# Altium PCB USB_NRF.PcbDoc
Units mil, origin at the board's own origin, x right, y up, seen from the top; angles counter-clockwise.
Board outline 2130 x 670 mil, 2 copper layers (Top Layer, Bottom Layer); 28 components, 32 nets, 154 pads, 96 vias.
Unrouted connection lines stored in the file: 3.
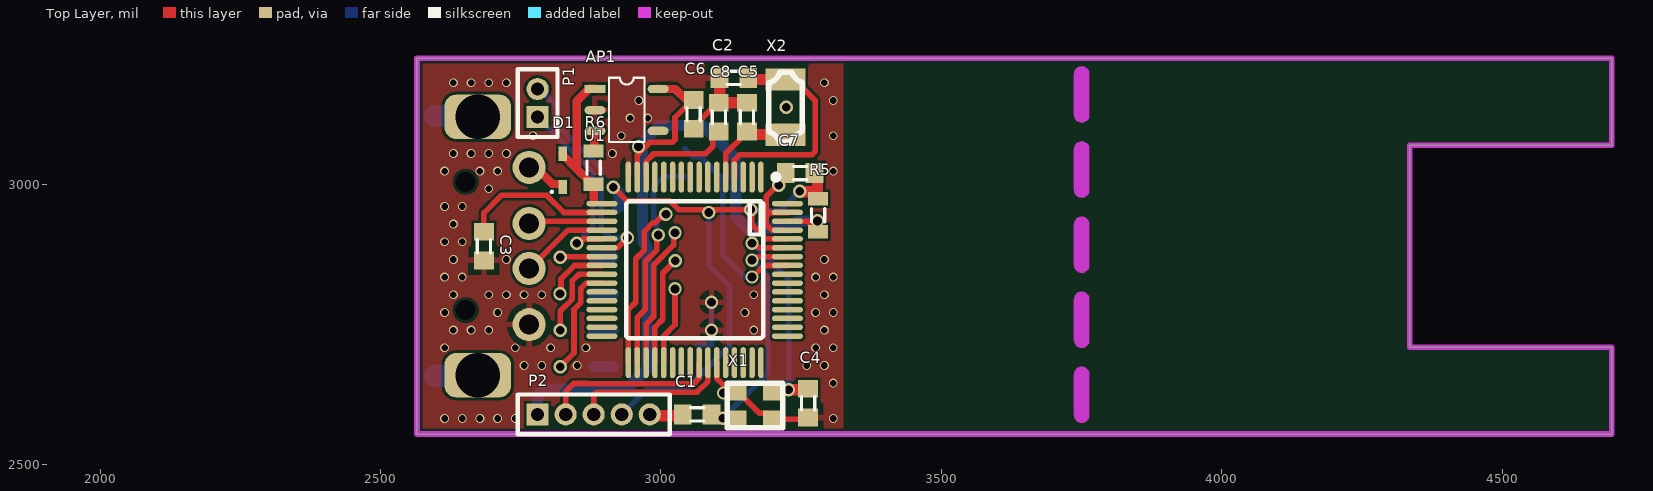
[diagram p0: Top Layer view]
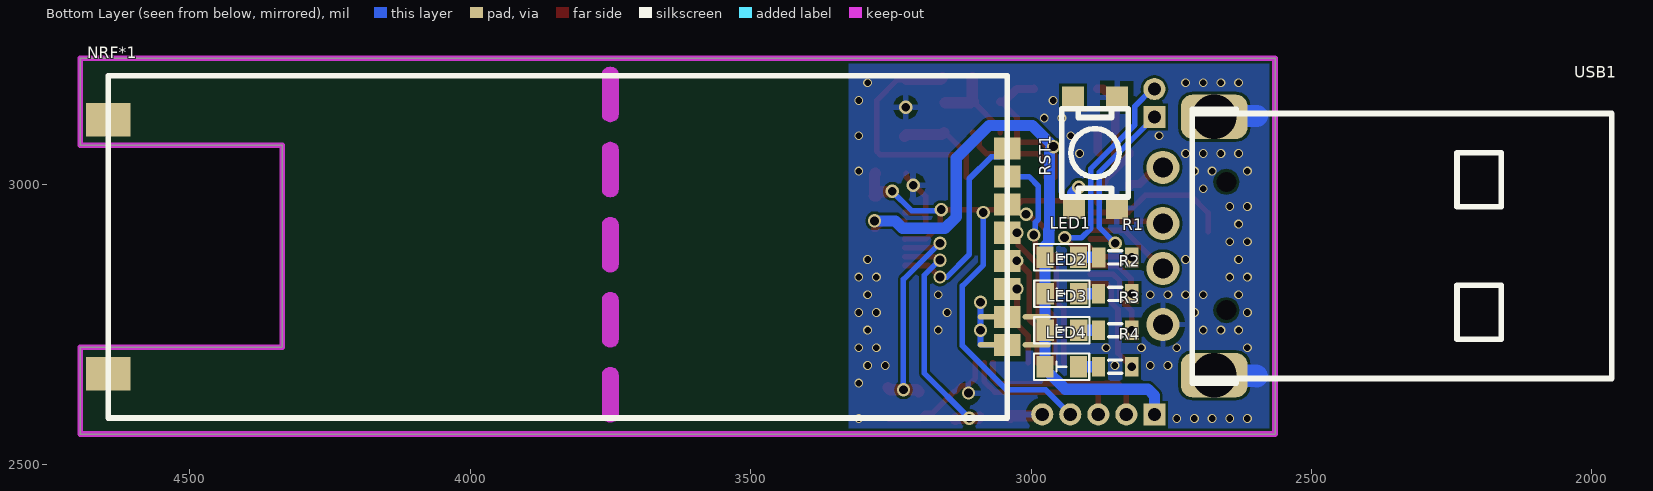
[diagram p1: Bottom Layer view, seen from below]
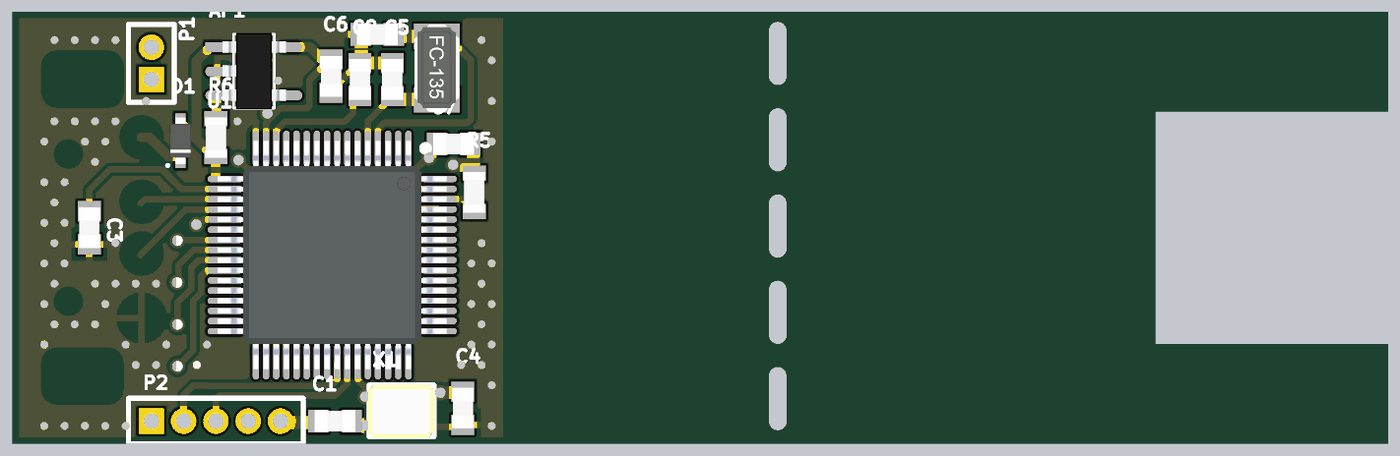
[diagram p2: 3D render of the assembled board from above, using the file's embedded part models]
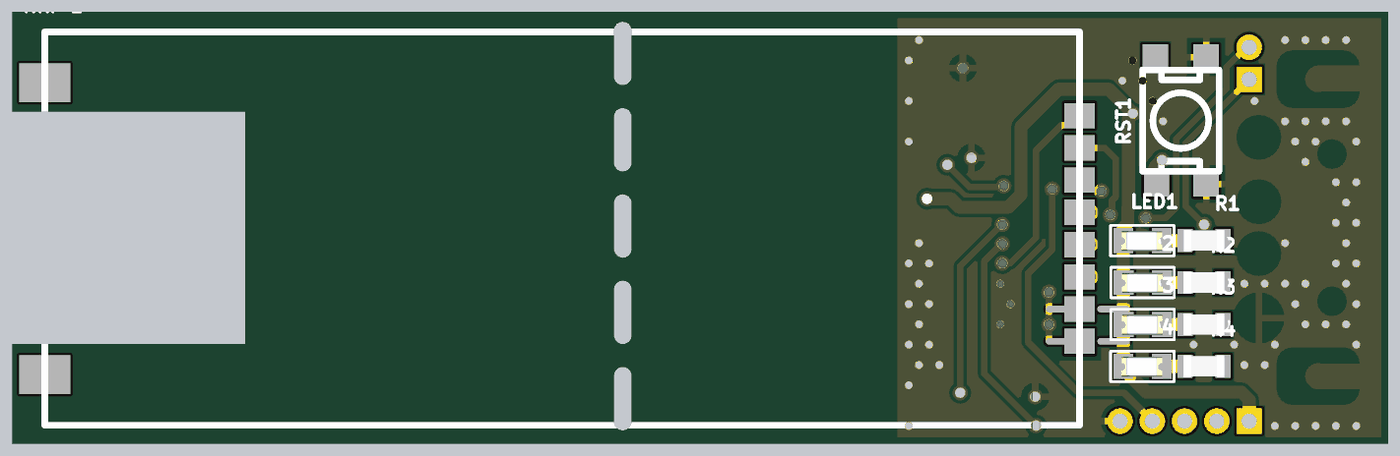
[diagram p3: 3D render of the assembled board from below, using the file's embedded part models]

## Layer stack, top to bottom
Top Solder: solder mask 0.4, Solder Resist, Dk 3.5
Top Layer: signal copper 1.4
Dielectric 1: dielectric 12.6, FR-4, Dk 4.8
Bottom Layer: signal copper 1.4
Bottom Solder: solder mask 0.4, Solder Resist, Dk 3.5

## Board outline
2565,2555 2565,3225 4695,3225 4695,3070 4335,3070 4335,2710 4695,2710 4695,2555
cut-out: 3736.21,2991.06 ccw(c3750,2991.06) 3763.79,2991.06 3763.79,3061.93 ccw(c3750,3061.93) 3736.21,3061.93
cut-out: 3736.21,2857.2 ccw(c3750,2857.2) 3763.79,2857.2 3763.79,2928.07 ccw(c3750,2928.07) 3736.21,2928.07
cut-out: 3736.21,2723.35 ccw(c3750,2723.35) 3763.79,2723.35 3763.79,2794.21 ccw(c3750,2794.21) 3736.21,2794.21
cut-out: 3736.21,2589.49 ccw(c3750,2589.49) 3763.79,2589.49 3763.79,2660.35 ccw(c3750,2660.35) 3736.21,2660.35
cut-out: 3736.21,3124.92 ccw(c3750,3124.92) 3763.79,3124.92 3763.79,3195.79 ccw(c3750,3195.79) 3736.21,3195.79

## Design rules (kind name [scope] priority, off if disabled: settings)
Clearance [All] p1: gap=5 ignorepadtopadclearanceinfootprint=FALSE
PolygonConnect [All] p1: connectstyle=Relief reliefconductorwidth=10 reliefentries=4 polygonreliefangle="90 Angle" airgapwidth=10
RoutingVias [All] p1: holewidth=28 width=50 viastyle="Through Hole" minholewidth=15.75 minwidth=23.62 maxholewidth=28 maxwidth=50
SolderMaskExpansion [All] p1: expansion=4
Width [All] p1: maxlimit=40 minlimit=7 preferedwidth=10 minimp=50.000000 maximp=50.000000 favimp=50.000000
30 further rules are at their usual default settings.

## Components (designator, comment, footprint, x,y, rotation, side; value= is the part's Value field where it differs from the comment)
AP1 "AP2112" SOT-23-5 2907.2,3190.24 r0 top
C1 "Cap" Cap_0603 3064.52,2590 r0 top value=20pf
C2 "Cap" Cap_0603 3130,3190 r0 top value=20pf
C3 "Cap" Cap_0603 2684.17,2890 r270 top value=1uf
C4 "Cap" Cap_0603 3262.36,2610 r90 top value=20pf
C5 "Cap" Cap_0603 3153.03,3120 r270 top value=20pf
C6 "Cap" Cap_0603 3058.31,3125 r90 top value=1uf
C7 "Cap" Cap_0603 3248.03,3020 r0 top value=0.1uf
C8 "Cap" Cap_0603 3103.03,3120 r270 top value=1uf
D1 "Schottky" SOD-523 2825,3025 r90 top
LED1 "LED" SMD-0603_LED 2975,2870 r180 bottom
LED2 "LED" SMD-0603_LED 2974.45,2805 r180 bottom
LED3 "LED" SMD-0603_LED 2974.45,2740 r180 bottom
LED4 "LED" SMD-0603_LED 2975,2675 r180 bottom
NRF*1 "NRF24L01" NRF24L01_with_Antenna 3042.64,2583.5 r0 bottom
P1 "MHDR1X2" MHDR1X2 2780,3120 r90 top
P2 "MHDR1X5" MHDR1X5 2780,2590 r0 top
R1 "Res" RES_0603 2849.78,2870 r180 bottom value=1K
R2 "Res" RES_0603 2850,2805 r180 bottom value=1K
R3 "Res" RES_0603 2850,2739.99 r180 bottom value=1K
R4 "Res" RES_0603 2850,2674.99 r180 bottom value=1K
R5 "Res" RES_0603 3280,2945 r90 top value=10K
R6 "Res" RES_0603 2880,3030 r270 top value=100K
RST1 "SPST" "TACK-SW_SMD 2P 4x3mm_2" 2945,3135 r180 bottom
U1 "NUC240SE3AE" MCU_LQFP_64_7x7 3060,2847.64 r270 top
USB1 "Standard" USB_Type-A_P_Thru-Hole 1964.61,2653.94 r0 bottom
X1 "Xtal" 2520S 3135.04,2630.45 r0 top value=12M
X2 "Xtal" FC-135 3155.07,3151.17 r270 top value=32.768k

## Footprints (in the part's own frame and the unit in brackets; to place one, negate y for a bottom-side part, rotate by r counter-clockwise, add the part's x,y. Pads: shape width x height; smd on the part's side, far side on the other; paste and mask are expansions set on the pad)
2520S [mm]
  rect 0.9x0.8 smd: 1(0,-1.25) 2(1.65,0) ""(0,0) ""(1.65,-1.25)
  silkscreen extent -0.43,-1.63 2.07,0.37, body extent -0.49,-1.69 2.11,0.41, height 0.55
Cap_0603 [mm]
  rect 0.8x0.9 smd: 1(-0.65,0) 2(0.65,0)
  silkscreen extent -0.3,-0.3 0.3,0.3, body extent -0.8,-0.43 0.8,0.43, height 0.83
FC-135 [mm]
  rect 1x1.8 smd: 1(-0.91,1.7) 2(1.59,1.7)
  silkscreen extent -1.24,0.94 1.94,2.46, body extent -1.28,0.95 1.92,2.45, height 0.8
MCU_LQFP_64_7x7 [mm]
  oval 1.4x0.25 smd: 1(-4.2,3) 2(-4.2,2.6) 3(-4.2,2.2) 4(-4.2,1.8) 5(-4.2,1.4) 6(-4.2,1) 7(-4.2,0.6) 8(-4.2,0.2) 9(-4.2,-0.2) 10(-4.2,-0.6) 11(-4.2,-1) 12(-4.2,-1.4) 13(-4.2,-1.8) 14(-4.2,-2.2) 15(-4.2,-2.6) 16(-4.2,-3) 33(4.2,-3) 34(4.2,-2.6) 35(4.2,-2.2) 36(4.2,-1.8) 37(4.2,-1.4) 38(4.2,-1) 39(4.2,-0.6) 40(4.2,-0.2) 41(4.2,0.2) 42(4.2,0.6) 43(4.2,1) 44(4.2,1.4) 45(4.2,1.8) 46(4.2,2.2) 47(4.2,2.6) 48(4.2,3)
  oval 0.25x1.4 smd: 17(-3,-4.2) 18(-2.6,-4.2) 19(-2.2,-4.2) 20(-1.8,-4.2) 21(-1.4,-4.2) 22(-1,-4.2) 23(-0.6,-4.2) 24(-0.2,-4.2) 25(0.2,-4.2) 26(0.6,-4.2) 27(1,-4.2) 28(1.4,-4.2) 29(1.8,-4.2) 30(2.2,-4.2) 31(2.6,-4.2) 32(3,-4.2) 49(3,4.2) 50(2.6,4.2) 51(2.2,4.2) 52(1.8,4.2) 53(1.4,4.2) 54(1,4.2) 55(0.6,4.2) 56(0.2,4.2) 57(-0.2,4.2) 58(-0.6,4.2) 59(-1,4.2) 60(-1.4,4.2) 61(-1.8,4.2) 62(-2.2,4.2) 63(-2.6,4.2) 64(-3,4.2)
  silkscreen extent -4.32,-3.1 3.1,3.8, body extent -4.5,-4.5 4.5,4.5, height 1.55
MHDR1X2 [mm] "Connector; Header; 2 Position"
  rect 1x1 hole 0.6: 1(0,0)
  round 1 hole 0.6: 2(1.27,0)
  silkscreen extent -0.9,-0.9 2.17,0.9
MHDR1X5 [mm] "Connector; Header; 5 Position"
  rect 1x1 hole 0.6: 1(0,0)
  round 1 hole 0.6: 2(1.27,0) 3(2.54,0) 4(3.81,0) 5(5.08,0)
  silkscreen extent -0.9,-0.9 5.98,0.9
NRF24L01_with_Antenna [mm]
  rect 1.2x1 smd: 1(0,-4.58) 2(0,-3.31) 3(0,-5.85) 4(0,-7.12) 5(0,-8.39) 6(0,-9.66) 7(0,-10.93) 8(0,-12.2)
  round 1.524 on Mech1: 1(4.44,-11.55) 2(1.9,-11.55) 3(1.9,-9.01) 4(4.44,-9.01) 5(1.9,-6.47) 6(4.44,-6.47) 7(1.9,-3.93) 8(4.44,-3.93)
  rect 2x1.524 smd: 2(40.7,-13.5) 2(40.7,-2)
  silkscreen extent 0,-15.5 40.7,0
RES_0603 [mm]
  rect 0.6x0.9 smd: 1(-0.75,0) 2(0.75,0)
  silkscreen extent -0.3,-0.3 0.3,0.3, body extent -0.8,-0.43 0.8,0.43, height 0.48
SMD-0603_LED [mm]
  rect 0.78x0.98 smd: 1(0,0) 2(1.51,0)
  silkscreen extent -0.5,-0.6 2,0.6, body extent -0.08,-0.41 1.54,0.45, height 0.6
SOD-523 [mm] "SODFL, 2-Leads, Body 0.80x1.60mm, IPC Medium Density"
  rect 0.65x0.4 smd: 1(-0.75,0) 2(0.75,0)
  silkscreen extent -1.02,0.45 -0.93,0.55, body extent -0.91,-0.42 0.92,0.42, height 0.71
SOT-23-5 [mm]
  rect 0.95x0.38 smd: 1(-0.63,-0.51)
  oval 0.95x0.38 smd: 2(-0.63,-1.47) 3(-0.63,-2.41) 4(2.23,-2.41) 5(2.23,-0.51)
  silkscreen extent 0,-2.91 1.61,0, body extent -0.44,-2.95 2.06,0.05, height 1.09
"TACK-SW_SMD 2P 4x3mm_2" [mm]
  rect 1x1 smd: 1(0.5,0.5) 1(0.55,-4.5) 2(2.5,-4.5) 2(2.5,0.5)
  silkscreen extent 0,-4 3,0
USB_Type-A_P_Thru-Hole [mm]
  round 1.5 hole 0.9: 1(20.33,-9.56) 2(20.33,-7.02) 3(20.33,-4.98) 4(20.33,-2.44)
  round 0 hole 0.9: ""(17.45,-8.9) ""(17.45,-3.1)
  rrect50% 3x2 hole 2: ""(18,-11.85) ""(18,-0.15)
  silkscreen extent 0,-12.2 19,0.2, body extent 0.47,-12.29 20.39,0.31, height 3.2

## Part data
D1: library part Diode2
NRF*1: library part NRF24L01_module
P1: "Header, 2-Pin", LatestRevisionDate=17-Jul-2002, LatestRevisionNote="Re-released for DXP Platform.", Publisher="Altium Limited"
P2: "Header, 5-Pin", LatestRevisionDate=17-Jul-2002, LatestRevisionNote="Re-released for DXP Platform.", Publisher="Altium Limited"
RST1: library part Switch_Button1
USB1: library part USB1
U1: OriginalSymbolOrigin=(0,0)

## Free pads (board coordinates)
  oval 50x10 smd far side: 2(2990,2713.82) 2(2990,2763.82)
  oval 60x10 smd far side: 2(3065,2713.82) 2(3065,2763.82)

## Via types
v1: diameter 15.75, hole 11.81, Top Layer to Bottom Layer, tented both sides, 69 vias
v2: diameter 23.62, hole 15.75, Top Layer to Bottom Layer, tented both sides, 27 vias

## Nets (pads, with @x,y where several pads share a name; then routed paths per layer and width w, separated by ;. In a path a pad name is that pad's centre, name@x,y a point inside that pad or via, vN(x,y) a via of type N, cw(c..) or ccw(c..) an arc to the next point about the centre after c; other vN are vias at no path point)
D12I: C4.2 U1.59 X1.2 | length 412.7
  Top Layer w10: v2(3162.36,2895) 3166.05,2895 3174.04,2887.01 U1.59
  Top Layer w20: X1.2 3203.55,2634.01 v2(3227.5,2634.01) 3251.45,2634.01 C4.2@3255,2637.56
  Bottom Layer w10: v2(3162.36,2895) 3163.21,2895 3227.5,2830.71 v2(3227.5,2634.01)
D12O: C1.2 U1.58 X1.1 | length 437.1
  Top Layer w10: v2(3162.36,2865) 3166.05,2865 3172.31,2871.26 U1.58
  Top Layer w20: C1.2@3092.08,2585 3093.96,2583.12 v2(3110,2583.12) 3133.16,2583.12 X1.1
  Bottom Layer w10: v2(3110,2583.12) 3190,2663.12 3190,2838.21 3163.21,2865 v2(3162.36,2865)
D+: U1.20 USB1.3 | length 160.6
  Top Layer w10: USB1.3@2763.39,2847.64 2834.25,2918.5 U1.20
D-: U1.19 USB1.2 | length 133.9
  Top Layer w10: USB1.2@2763.39,2927.95 2769.61,2934.17 2894.57,2934.17 U1.19
DVBUS: AP1.1 D1.2 R6.2 U1.17 | length 276.7
  Top Layer w15: D1.2@2825,3057.48 2825,3052.56 2849.78,3027.78 ; U1.17@2880,2968.33 2880,2998.43 2876.06,2998.43 2869.78,3004.7 2869.78,3007.78 2849.78,3027.78 ; AP1.1 2871.22,3170.16 2849.78,3148.72 2849.78,3027.78
GND: AP1.2 C1.1 C2.1 C3.2 C4.1 C5.1 C6.1 C7.1 C8.1 NRF*1.1@3042.64,2763.82 NRF*1.2@3042.64,2713.82 NRF*1.2@4645,2662.24 NRF*1.2@4645,3115 P2.5 pad.2@3065,2713.82 pad.2@3065,2763.82 RST1.2 U1.16 U1.43 U1.61 U1.63 USB1.4 USB1.@2673.27,2659.84 USB1.@2673.27,3120.47 X1. | length 883.6
  Top Layer w10: C6.1@3055,3092.44 3055,3099.53 C8.1@3103.03,3147.56 ; U1.43 3099.45,2682.2 3099.45,2654.21 3112.46,2641.2 3124.29,2641.2 3135.04,2630.45 3137.01,2630.45 3175.47,2591.99 3189.25,2591.99 3200,2581.24 3253.8,2581.24 C4.1@3255,2582.44 ; C7.1 3222.44,3013.58 3187.8,2978.94 3187.8,2944.14 ; U1.61 3225.28,2918.58 3197.28,2918.58 3187.8,2928.07 3187.8,2944.14 ; U1.63 3193.65,2950 3187.8,2944.14
  Top Layer w20: P2.5 2982.5,2587.5 3034.46,2587.5 C1.1@3036.96,2585 ; C8.1@3103.03,3147.56 C8.1@3104.7,3149.23 ; C2.1 3104.7,3189.71 C8.1@3104.7,3149.23 ; C5.1 3108.35,3145.59 C8.1@3104.7,3149.23
  Bottom Layer w10: NRF*1.2@3065,2713.82 3090,2713.82 v2(3090,2740) v2(3090,2790)
  Bottom Layer w40: 2597.34,2658.22 2598.34,2659.22 2672.64,2659.22 USB1.@2673.27,2659.84 ; 2597.34,3121.9 2671.84,3121.9 USB1.@2673.27,3120.47
  other v1: 2614.18,2582.68 2645.67,2582.68 2677.17,2582.68 2708.66,2582.68 2740.16,2582.68 3307.09,2582.68 3307.09,2645.67 2755.91,2677.17 2787.4,2677.17 2850.4,2677.17 3259.85,2677.17 3291.34,2677.17 2614.18,2708.66 2740.16,2708.66 2803.15,2708.66 2866.15,2708.66 3275.59,2708.66 3307.09,2708.66 2629.92,2740.16 2661.42,2740.16 2692.92,2740.16 3165.36,2740.16 3291.34,2740.16 2614.18,2771.66 2708.66,2771.66 3149.61,2771.66 3275.59,2771.66 3307.09,2771.66 2629.92,2803.15 2692.92,2803.15 2724.41,2803.15 2755.91,2803.15 2787.4,2803.15 3165.36,2803.15 3291.34,2803.15 2614.18,2834.65 2645.67,2834.65 3275.59,2834.65 3307.09,2834.65 2629.92,2866.15 2724.41,2866.15 3291.34,2866.15 2614.18,2897.64 2645.67,2897.64 2629.92,2929.14 2614.18,2960.63 2645.67,2960.63 2692.92,2992.13 2614.18,3023.63 2677.17,3023.63 2708.66,3023.63 3307.09,3023.63 2629.92,3055.12 2661.42,3055.12 2692.92,3055.12 2724.41,3055.12 2913.39,3055.12 2771.66,3086.62 2929.14,3086.62 3307.09,3086.62 2944.89,3118.11 2976.38,3118.11 2960.63,3149.61 3307.09,3149.61 2629.92,3181.11 2661.42,3181.11 2692.92,3181.11 2724.41,3181.11 3291.34,3181.11
  other v2: 3111.25,2627.95 3210,2998.43 3223.36,3137.63
ICE_CLK: P2.3 U1.42 | length 281.9
  Top Layer w10: P2.3 2880,2625 2884.72,2629.72 3064.52,2629.72 3083.54,2648.75 3083.54,2682.2 U1.42
ICE_DAT: P2.2 U1.41 | length 316.4
  Top Layer w10: P2.2 2830,2630.45 2844.55,2645 2866.42,2645 2866.7,2644.72 3058.31,2644.72 3067.8,2654.21 3067.8,2682.2 U1.41
LED1: R1.2 U1.23 | length 74.7
  Top Layer w10: v2(2820.47,2870) 2821.65,2871.18 2894.57,2871.18 U1.23
LED2: R2.2 U1.24 | length 110.2
  Top Layer w10: v2(2820,2805) 2821.81,2806.81 2821.81,2831.81 2845.51,2855.51 U1.24
LED3: R3.2 U1.25 | length 154.6
  Top Layer w10: v2(2820.47,2740) 2820.47,2774.15 2842.09,2795.77 2842.09,2828.39 2853.39,2839.69 2894.57,2839.69 U1.25
LED4: R4.2 U1.26 | length 196.1
  Top Layer w10: v2(2820.47,2675) 2844.83,2699.35 2844.83,2777.3 2857.09,2789.56 2857.09,2814.45 2866.58,2823.94 2894.57,2823.94 U1.26
NetAP1_3: AP1.3 R6.1 | length 39.6
  Top Layer w15: R6.1@2880,3057.48 2881.2,3058.68 2881.2,3095.33 AP1.3
NetC3_1: C3.1 U1.18 | length 269.9
  Top Layer w10: C3.1 2684.18,2949.18 2715.75,2980.75 2796.13,2980.75 2826.88,2950 U1.18
NetC8_2: C8.2 U1.14 | length 189.4
  Top Layer w10: U1.14 2973.46,3013.07 2973.46,3041.06 2987.01,3054.61 3008.39,3054.61 3079.61,3054.61 3092.28,3067.28 3092.28,3081.69 3103.03,3092.44 C8.2@3105,3092.44
NetD1_1: D1.1 USB1.1 | length 77.3
  Top Layer w15: USB1.1 2776.92,3030.32 2806.47,3000.77 2824.63,3000.77 2825,3000.39 D1.1
NetLED1_2: LED1.2 R1.1 | length 36.2
  Bottom Layer w20: R1.1 LED1.2@2915.55,2870
NetLED2_2: LED2.2 R2.1 | length 35.5
  Bottom Layer w20: R2.1 LED2.2
NetLED3_2: LED3.2 R3.1 | length 35.5
  Bottom Layer w20: R3.1 LED3.2
NetLED4_2: LED4.2 R4.1 | length 36
  Bottom Layer w20: R4.1 LED4.2
NRF_CE: NRF*1.3@3042.64,2813.82 U1.37 | length 139.9
  Top Layer w10: U1.37 3004.88,2729.88 3025,2750 v2(3025,2813.82)
NRF_IRQ: NRF*1.8@3042.64,3063.82 U1.57 | length 365.1
  Top Layer w10: v2(3162.36,2835) 3163.21,2835 3183.64,2855.43 3225.28,2855.43 U1.57
  Bottom Layer w10: NRF*1.8@3042.64,3063.82 3057.32,3049.13 3070.87,3049.13 3110,3010 3110,2875 3150,2835 v2(3162.36,2835)
RESET: C7.2 P2.4 R5.2 RST1.1 U1.60 | length 1081.8
  Top Layer w10: v2(2915,2995) 2939.41,2970.59 3015.76,2970.59 3031.35,2955 3085,2955 v2(3160,2955) 3161.81,2953.19 3161.81,2928.19 3187.17,2902.83 3225.28,2902.83 U1.60
  Top Layer w20: v2(3247.34,2987.66) 3248.03,2986.97 3268.62,2986.97 3276.06,2979.53 3280,2979.53 3278.78,2980.75 3278.78,3018.78 C7.2@3277.56,3020
  Bottom Layer w10: P2.4 2974.01,2634.01 3044.01,2634.01 3122.43,2712.43 3122.43,2819.16 3085,2856.6 v2(3085,2950) ; v2(3160,2955) 3160.59,2955 3162.36,2953.22 3212.9,2953.22 v2(3247.34,2987.66)
  Bottom Layer w20: v2(2915,2995) 2925.69,2984.31 2925.69,2960.18 RST1.1@2923.35,2957.83
SPI1_CLK: NRF*1.5@3042.64,2913.82 U1.35 | length 252.9
  Top Layer w10: U1.35 2973.39,2751.38 2987.01,2765 2987.01,2856.26 3022.39,2891.65 3022.39,2911.21 v2(3025,2913.82)
SPI1_CSN: NRF*1.4@3042.64,2863.82 U1.36 | length 196.6
  Top Layer w10: U1.36 2989.13,2745.61 3003.19,2759.67 3003.19,2841.6 v2(3025.41,2863.82)
SPI1_MISO: NRF*1.7@3042.64,3013.82 U1.34 | length 396.3
  Top Layer w10: U1.34 2957.64,2762.4 2972.01,2776.77 2972.01,2862.47 2992.72,2883.19 2992.72,2907.72 v2(2995,2910)
  Bottom Layer w10: v2(2995,2910) 2992.39,2912.61 2992.39,2932.27 2986.81,2937.85 2986.81,2996.81 3003.82,3013.82 NRF*1.7@3042.64,3013.82
SPI1_MOSI: NRF*1.6@3042.64,2963.82 U1.33 | length 296.7
  Top Layer w10: U1.33 2941.89,2776.89 2955,2790 2955,2867.47 2970.48,2882.96 2970.48,2916.33 2985.97,2931.81 2989.86,2931.81 3004.94,2946.88 v2(3008.62,2946.88)
UART_0_RX: P1.1 U1.21 | length 325.5
  Top Layer w10: v2(2849.78,2895) 2853.47,2895 2861.15,2902.68 2894.57,2902.68 U1.21
  Bottom Layer w10: P1.1 2878.19,3021.81 2878.19,2923.41 v2(2849.78,2895)
UART_0_TX: P1.2 U1.22 | length 404.5
  Top Layer w10: U1.22 2894.72,2887.09 2900,2887.09 2922.72,2887.09 2940,2904.37 v2(2940,2905)
  Bottom Layer w10: P1.2 2784.14,3170 2815,3139.14 2815,3106.21 2893.19,3028.02 2893.19,2921.72 2909.9,2905 v2(2940,2905)
VDD_33: AP1.5 C6.2 LED1.1 LED2.1 LED3.1 LED4.1 P2.1 pad.2@2990,2713.82 pad.2@2990,2763.82 R5.1 U1.15 U1.62 | length 1452.9
  Top Layer w10: U1.15 2957.72,3013.07 2957.72,3052.72 2980,3075 3020,3075 3025,3080 3025,3119.53 3048.03,3142.56 C6.2@3048.03,3147.56 ; U1.62 3225.43,2934.17 3230.71,2934.17 3262.36,2934.17 3276.06,2920.47 R5.1@3280,2920.47
  Top Layer w15: AP1.5@2995.02,3170.14 3025.45,3170.14 3048.03,3147.56 C6.2@3055,3147.56
  Bottom Layer w20: P2.1 2780,2623.28 2791.72,2635 2938.94,2635 2975,2671.06 LED4.1 2975,2744.49 2975,2805 LED1.1 2975,2890 2968.19,2896.81 2968.19,2918.53 2966.81,2919.9 2966.81,3060.47 v2(2960,3067.28) 2997.72,3105 3075,3105 3133.19,3046.81 3133.19,2941.81 3153.19,2921.81 3228.86,2921.81 3242.05,2935 v2(3278.78,2935)
X32I: C5.2 U1.5 X2.2 | length 170
  Top Layer w10: U1.5 3115.2,3013.07 3115.2,3054.61 3153.03,3092.44 C5.2@3155,3092.44
  Top Layer w20: C5.2@3155,3092.44 3158.43,3089.01 3221.57,3089.01 X2.2@3225,3085.57
X32O: C2.2 U1.4 X2.1 | length 405.8
  Top Layer w10: U1.4 3130.94,3013.07 3130.94,3043.66 3140,3052.72 3165.87,3052.72 3268.87,3052.72 3274.72,3058.57 3274.72,3150.02 3237.75,3187 X2.1
  Top Layer w20: C2.2@3157.56,3190 3160.56,3187 X2.1
pads on no net: AP1.4 NRF*1.1@3217.44,3038.23 NRF*1.2@3117.44,3038.23 NRF*1.3@3117.44,2938.23 NRF*1.4@3217.44,2938.23 NRF*1.5@3117.44,2838.23 NRF*1.6@3217.44,2838.23 NRF*1.7@3117.44,2738.23 NRF*1.8@3217.44,2738.23 U1.1 U1.2 U1.3 U1.6 U1.7 U1.8 U1.9 U1.10 U1.11 U1.12 U1.13 U1.27 U1.28 U1.29 U1.30 U1.31 U1.32 U1.38 U1.39 U1.40 U1.44 U1.45 U1.46 U1.47 U1.48 U1.49 U1.50 U1.51 U1.52 U1.53 U1.54 U1.55 U1.56 U1.64 USB1.@2651.61,2775.98 USB1.@2651.61,3004.33

## Polygon pours and split planes (outlines as drawn)
GND on Top Layer "Top Layer-GND" (solid, pour order 32): 2565,3225 3325,3225 3325,2555 2565,2555
GND on Bottom Layer "Bottom Layer-GND" (solid, pour order 30): 2565,3225 3325,3225 3325,2555 2565,2555

## Keep-outs
Keep-Out Layer:
  lines w10: 2565,2555 2565,3225 4695,3225 4695,3070 4335,3070 4335,2710 4695,2710 4695,2555 2565,2555
  lines w27.56: 3750,2589.49 3750,2660.35 ; 3750,2723.35 3750,2794.21 ; 3750,2857.2 3750,2928.07 ; 3750,2991.06 3750,3061.93 ; 3750,3124.92 3750,3195.79